# Altium PCB 24DC-8MWPCB.PcbDoc (part 1 of 2)
Units mm, origin at the board's own origin, x right, y up, seen from the top; angles counter-clockwise.
Board outline 24.64 x 72.65 mm, 2 copper layers (Bottom Layer, Top Layer); 12 components, 34 nets, 50 pads, 4349 vias.
Unrouted connection lines stored in the file: 12.
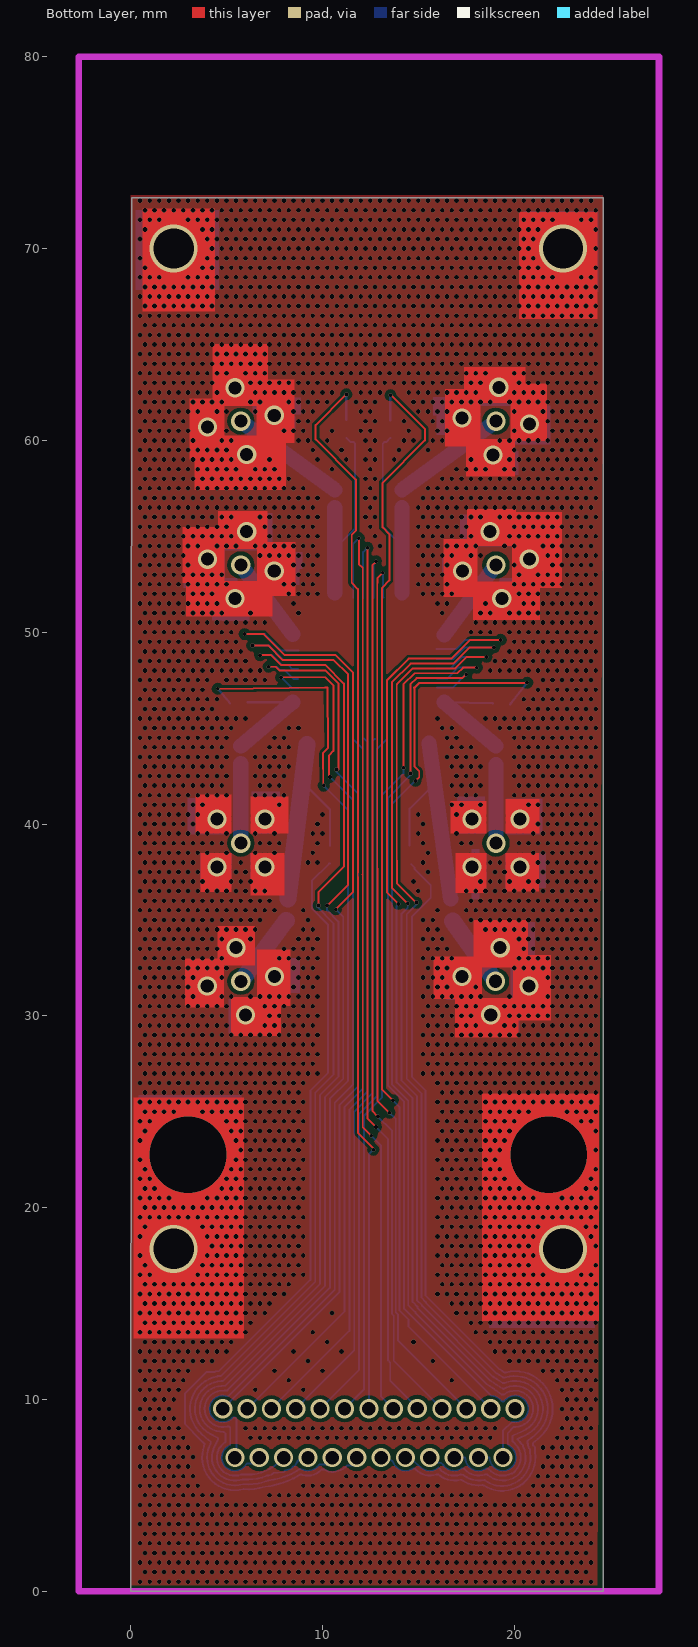
[diagram p0: Bottom Layer view]
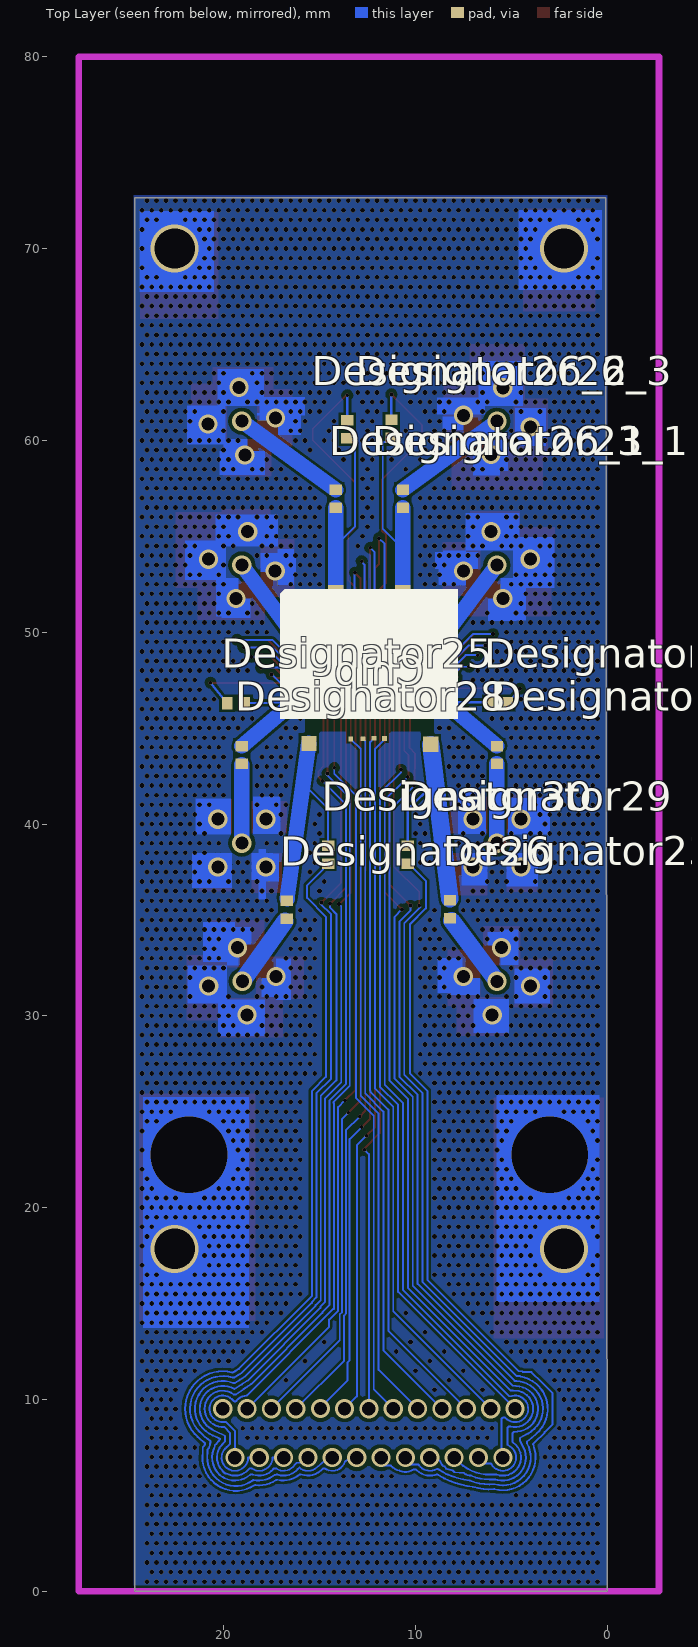
[diagram p1: Top Layer view, seen from below]

## Layer stack, top to bottom
Top Solder: solder mask 0.0102, Solder Resist, Dk 3.5
Bottom Layer: signal copper 0.0356
Dielectric 1: dielectric 0.32, FR-4, Dk 4.8
Top Layer: signal copper 0.0356
Bottom Solder: solder mask 0.0102, Solder Resist, Dk 3.5

## Board outline
0,0 24.638,0 24.638,72.65 0.075,72.65

## Design rules (kind name [scope] priority, off if disabled: settings)
Clearance [All] p1: gap=0.2 ignorepadtopadclearanceinfootprint=FALSE except(0.1: Arc-Arc Arc-Track Track-Track; 0.127: Arc-Fill Arc-Poly Arc-Region Track-Fill Track-Poly Track-Region SMDPad-Fill SMDPad-Poly SMDPad-Region; 0.25: Via-Via Via-Hole)
PolygonConnect [All] p1: connectstyle=Relief reliefconductorwidth=0.254 reliefentries=4 polygonreliefangle="90 Angle" airgapwidth=0.254
RoutingVias [All] p1: holewidth=0.711 width=1.27 viastyle="Through Hole" minholewidth=0.711 minwidth=1.27 maxholewidth=0.711 maxwidth=1.27
SolderMaskExpansion [All] p1: expansion=0.102 istentingtop=FALSE
Width "DC Width" [InNetClass('DC')] p1: maxlimit=0.254 minlimit=0.1 preferedwidth=0.254 minimp=50.000000 maximp=50.000000 favimp=50.000000
Width "MW Width" [InNetClass('MW')] p2: maxlimit=0.8 minlimit=0.254 preferedwidth=0.254 minimp=50.000000 maximp=50.000000 favimp=50.000000
30 further rules are at their usual default settings.

## Classes and differential pairs
net class DC: DC1 DC2 DC3 DC4 DC5 DC6 DC7 DC8 DC9 DC10 DC11 DC12 DC13 DC14 DC15 DC16 DC17 DC18 DC19 DC20 DC21 DC22 DC23 DC24
net class MW: MW1 MW3 MW4 MW5 MW6 MW7 "MW 2" "MW 8"

## Components (designator, comment, footprint, x,y, rotation, side; value= is the part's Value field where it differs from the comment)
Designator23 "Comment" CAPC1005X55N 8.2,35.55 r90 bottom
Designator23_1 "Comment" CAPC1005X55N 10.65,56.95 r90 bottom
Designator24 "Comment" CAPC1005X55N 5.65,46.3 r0 bottom
Designator25 "Comment" CAPC1005X55N 19.35,46.3 r0 bottom
Designator26 "Comment" CAPC1005X55N 16.7,35.535 r90 bottom
Designator26_1 "Comment" CAPC1005X55N 14.15,56.95 r90 bottom
Designator26_2 "Comment" CAPC1005X55N 13.55,60.585 r90 bottom
Designator26_3 "Comment" CAPC1005X55N 11.25,60.6 r90 bottom
Designator27 "Comment" CAPC1005X55N 5.75,43.6 r90 bottom
Designator28 "Comment" CAPC1005X55N 19.05,43.6 r90 bottom
Designator29 "Comment" CAPC1005X55N 10.4,38.4 r90 bottom
Designator30 "Comment" CAPC1005X55N 14.55,38.4 r90 bottom

## Footprints (in the part's own frame and the unit in brackets; to place one, negate y for a bottom-side part, rotate by r counter-clockwise, add the part's x,y. Pads: shape width x height; smd on the part's side, far side on the other; paste and mask are expansions set on the pad)
CAPC1005X55N [mm]
  rect 0.55x0.64 smd: 1(-0.465,0) 2(0.465,0)

## Free pads (board coordinates)
  rect 0.25x0.25 smd far side: 2(8.724,47.094) 2(8.738,47.569) 2(8.744,48.078) 2(8.75,48.55) 2(8.764,49.042) 2(11.608,44.458) 2(11.609,51.778) 2(12.126,51.771) 2(12.16,44.47) 2(12.656,51.778) 2(12.736,44.44) 2(13.193,51.799) 2(13.366,44.428) 2(15.946,49.113) 2(15.962,47.107) 2(15.962,48.102) 2(15.962,48.599) 2(15.973,47.583)
  rect 0.8x0.8 smd far side: 3(10.65,52.05) 3(14.15,52.05) 38(8.45,49.85) 41(16.35,49.85) Pad1(8.45,46.35) Pad1(9.2,44.15) Pad1(15.55,44.2) Pad1(16.35,46.35)

## Via types
v1: diameter 0.25, hole 0.25, Bottom Layer to Top Layer, 4242 vias
v2: diameter 1, hole 0.68, Bottom Layer to Top Layer, 40 vias
v3: diameter 0.2, hole 0.2, Bottom Layer to Top Layer, 36 vias
v4: diameter 1, hole 0.7, Bottom Layer to Top Layer, 25 vias
v5: diameter 2.5, hole 2.1, Bottom Layer to Top Layer, 3 vias
v6: diameter 4, hole 4, Bottom Layer to Top Layer, 2 vias
v7: diameter 2.5/2.5 (per signal layer), hole 2.1, Bottom Layer to Top Layer, 1 vias

## Nets (pads, with @x,y where several pads share a name; then routed paths per layer and width w, separated by ;. In a path a pad name is that pad's centre, name@x,y a point inside that pad or via, vN(x,y) a via of type N, cw(c..) or ccw(c..) an arc to the next point about the centre after c; other vN are vias at no path point)
DC1: pad.2@8.738,47.569 | length 47.2
  Bottom Layer w0.1: v3(7.2,48.2) 7.576,48.2 7.763,48.014 10.153,48.014 10.317,47.85 10.834,47.333 v3@10.834,42.843
  Top Layer w0.1: v4@4.972,9.677 v4(4.805,9.51) 10.901,15.606 10.901,25.36 11.85,26.309 11.85,41.6 10.744,42.706 v3(10.744,42.843) ; v3(7.2,48.2) 7.622,48.2 7.796,48.026 8.037,48.026 8.494,47.569 pad.2@8.738,47.569
DC2: pad.2@11.608,44.458 | length 37.5
  Top Layer w0.1: v4(6.075,9.51) 11.155,14.59 11.155,25.255 12.104,26.204 12.104,43.922 pad.2@11.662,44.364
DC3: pad.2@12.16,44.47 | length 37.1
  Top Layer w0.1: v4(7.345,9.51) 11.409,13.574 11.409,25.109 12.35,26.05 12.35,26.091 12.358,26.099 12.358,44.272 pad.2@12.16,44.47
DC4: pad.2@12.736,44.44 | length 36.9
  Top Layer w0.1: v4@8.851,9.51 v4(8.615,9.51) 11.663,12.558 11.663,25.004 12.612,25.953 12.612,44.316 pad.2@12.736,44.44
DC5: pad.2@13.366,44.428 | length 36.4
  Top Layer w0.1: v4(9.885,9.51) 11.917,11.542 11.917,24.899 12.85,25.832 12.85,43.912 pad.2@13.366,44.428
DC6: pad.2@15.973,47.583 | length 45.5
  Bottom Layer w0.1: v3(14.228,42.929) 14.228,47.278 14.808,47.858 17.044,47.858 17.336,48.15 v3(18.05,48.15)
  Top Layer w0.1: v4(11.155,9.51) 12.171,10.526 12.171,24.793 13.104,25.726 13.104,41.504 14.228,42.628 v3(14.228,42.929) ; pad.2@15.973,47.583 16.515,47.583 17.096,48.164 18.036,48.164 v3(18.05,48.15)
DC7: Designator26_3.1 Designator26_3.2 | length 63
  Bottom Layer w0.1: v3(11.25,62.4) 9.65,60.8 9.65,60.05 11.75,57.95 11.75,55.3 11.531,55.081 11.531,52.569 11.85,52.25 11.85,37.468 11.846,37.464 11.846,37.254 11.85,37.25 11.85,23.9 v3@12.695,23.055
  Bottom Layer w0.127: v4(12.425,9.51) v4@12.425,9.696
  Top Layer w0.1: 10.7,54.4 11.7,55.4 11.7,59.849 11.626,59.923 11.462,59.923 Designator26_3.1@11.25,60.135 ; v4(12.425,9.51) 12.425,22.785 v3(12.658,23.018)
  Top Layer w0.127: Designator26_3.2@11.25,61.065 v3(11.25,62.4)
DC8: pad.2@11.609,51.778 | length 49.4
  Bottom Layer w0.1: v3(11.9,54.9) 11.9,53.554 12.104,53.35 12.104,37.355 ; 12.1,37.359 12.104,37.355 ; v3(12.55,23.75) 12.104,24.196 12.104,37.355
  Top Layer w0.1: pad.2@11.609,51.778 11.609,54.609 v3(11.9,54.9) ; v3(12.55,23.75) 13.048,23.252 13.048,10.157 v4(13.695,9.51)
DC9: pad.2@12.126,51.771 | length 48.7
  Bottom Layer w0.1: v3(12.35,54.4) 12.358,54.392 12.358,52.85 ; 12.354,52.85 12.354,37.464 12.358,37.46 12.358,24.642 v3(12.8,24.2)
  Top Layer w0.1: pad.2@12.126,51.771 12.126,54.176 v3(12.35,54.4) v3@12.35,54.38 ; v3(12.8,24.2) 13.426,23.574 13.426,12.037 13.54,11.922 13.54,10.975 14.948,9.567 v4(14.948,9.527)
DC10: pad.2@12.656,51.778 | length 47.8
  Bottom Layer w0.1: 12.608,52.662 12.608,37.57 12.612,37.566 12.612,25.038 v3(12.9,24.75) ; 12.612,52.662 12.612,53.492 12.8,53.68 v3(12.8,53.7)
  Top Layer w0.1: pad.2@12.656,51.778 12.656,53.529 12.8,53.673 v3(12.8,53.7) ; v3(12.9,24.75) 13.626,24.024 13.626,14.465 13.72,14.371 13.72,12.025 v4(16.235,9.51)
DC11: pad.2@13.193,51.799 | length 47
  Bottom Layer w0.1: v3(13.15,53.1) 12.866,52.816 12.866,52.557 12.862,52.553 12.862,37.675 12.866,37.671 12.866,25.584 v3(13.5,24.95)
  Top Layer w0.1: v3(13.15,53.1) 13.169,53.081 13.169,51.823 pad.2@13.193,51.799 ; v3(13.5,24.95) 13.826,24.624 13.826,14.548 13.942,14.432 13.942,13.073 v4(17.505,9.51)
DC12: Designator26_2.1 Designator26_2.2 | length 65
  Bottom Layer w0.1: v3@13.575,62.375 15.35,60.6 15.35,60 13.14,57.791 13.14,55.46 13.5,55.1 13.5,52.7 13.116,52.316 13.116,37.78 13.12,37.776 13.12,26.157 v3(13.678,25.599)
  Top Layer w0.1: Designator26_2.1@13.55,60.135 13.324,59.908 13.224,59.908 13.15,59.834 13.15,55.5 14.3,54.35 ; v3(13.678,25.599) 13.678,25.592 14.026,25.244 14.026,14.631 14.494,14.163 14.494,13.791 v4(18.775,9.51)
  Top Layer w0.127: Designator26_2.2@13.55,61.05 v3(13.55,62.35)
DC13: 
  other v4: 20.045,9.51
DC14: pad.2@8.724,47.094 | length 49.7
  Bottom Layer w0.1: v3(7.85,47.65) 10.158,47.65 10.212,47.596 10.58,47.228 10.58,43.806 10.356,43.582 v3@10.356,42.45
  Top Layer w0.1: 5.046,10.164 4.955,10.184 ccw(c4.805,9.51) 4.803,8.82 ccw(c4.805,9.36) 4.805,8.819 ccw(c4.805,9.51) 5.298,9.027 cw(c5.389,8.938) 5.516,8.938 5.516,7.114 5.55,7.08 v4(5.44,6.97) ; 5.047,10.164 5.1,10.164 10.647,15.711 10.647,25.465 11.596,26.414 11.596,41.254 v3(10.4,42.45) ; v3(7.85,47.65) 7.844,47.65 8.4,47.094 pad.2@8.724,47.094
DC15: Designator24.1 Designator24.2 | length 57.1
  Bottom Layer w0.1: v3@4.551,47.04 10.132,47.119 10.259,47.121 10.304,43.97 10.023,43.681 v3@10.047,41.999
  Top Layer w0.1: 5.071,8.6 ccw(c5.073,8.473) 5.042,8.596 cw(c4.805,9.51) 4.762,10.454 ccw(c4.441,17.217) 5.05,10.473 10.393,15.816 10.393,25.672 11.342,26.621 11.342,40.727 v3(10.07,41.999) ; 5.072,8.6 cw(c5.073,8.473) 5.074,8.6 5.126,8.6 5.162,8.563 cw(c5.073,8.473) 5.163,8.562 5.2,8.525 5.2,7.648 5.163,7.611 ; 5.078,7.558 ccw(c5.44,6.97) 6.031,6.612 6.041,6.623 6.078,6.66 6.71,6.66 v4(6.71,6.97) ; 5.079,7.559 5.162,7.61
  Top Layer w0.127: v3(4.55,47.05) Designator24.1@5.185,46.3 ; Designator24.2@6.1,46.35 8.4,46.35 8.45,46.3
DC16: pad.2@8.764,49.042 | length 59.7
  Bottom Layer w0.1: v3(5.95,49.9) 6.954,49.9 8.05,48.804 10.696,48.804 11.596,47.904 11.596,36.446 v3(10.7,35.55)
  Top Layer w0.1: v3(5.95,49.9) 7,49.9 7.858,49.042 pad.2@8.764,49.042 ; v4(7.98,6.97) 7.947,6.929 7.911,6.885 7.88,6.885 cw(c6.104,8.43) 5.828,6.092 ccw(c5.813,5.966) 5.769,6.085 cw(c5.44,6.97) 5.324,6.033 cw(c5.434,6.929) 5.312,6.034 cw(c5.44,6.97) 4.896,7.742 4.901,7.746 4.946,7.791 4.946,8.237 4.909,8.274 ccw(c4.819,8.185) 4.908,8.275 4.872,8.312 4.855,8.312 cw(c4.805,9.51) 4.752,10.707 ccw(c4.441,17.217) 4.936,10.719 10.139,15.922 10.139,25.777 11.088,26.726 11.088,35.162 v3(10.7,35.55)
DC17: pad.2@8.75,48.55 | length 59.9
  Bottom Layer w0.1: v3(6.35,49.3) 7.195,49.3 7.945,48.55 10.591,48.55 11.342,47.799 11.342,41.383 11.342,36.842 v3(10.25,35.75)
  Top Layer w0.1: v3(6.35,49.3) 7.241,49.3 7.991,48.55 pad.2@8.75,48.55 ; v4(9.25,6.97) 8.804,6.85 8.76,6.839 8.728,6.807 8.593,6.573 8.57,6.532 8.482,6.509 8.45,6.477 8.4,6.39 8.355,6.378 8.044,6.295 cw(c7.91,6.343) 8.028,6.262 cw(c7.91,6.343) 7.947,6.205 7.934,6.204 7.474,6.174 cw(c7.111,6.537) 7.111,6.024 cw(c6.104,8.43) 6.145,5.822 5.847,5.817 ccw(c5.85,5.577) 5.797,5.811 5.711,5.803 cw(c5.44,6.97) 4.356,7.482 4.539,7.869 ccw(c4.424,7.923) 4.551,7.925 4.55,8 4.122,8.228 cw(c4.805,9.51) 3.373,9.752 3.406,9.948 3.49,10.128 cw(c4.805,9.51) 4.729,10.961 4.824,10.966 9.885,16.027 9.885,25.882 10.834,26.831 10.834,34.916 10.25,35.5 v3(10.25,35.75)
DC18: pad.2@8.744,48.078 | length 60.3
  Bottom Layer w0.1: v3(6.75,48.8) 7.336,48.8 7.84,48.296 10.154,48.296 11.126,47.324 11.126,37.781 9.8,36.455 v3(9.8,35.75)
  Top Layer w0.1: v3(6.75,48.8) 7.382,48.8 7.899,48.283 8.235,48.283 8.44,48.078 pad.2@8.744,48.078 ; 9.725,35.675 10.58,34.82 10.58,26.936 9.631,25.987 9.631,16.132 4.714,11.215 4.541,11.215 4.518,11.192 ccw(c4.805,9.51) 3.518,8.39 3.518,8.384 3.522,8.38 3.674,8.228 3.675,8.228 3.686,8.217 ccw(c7.287,11.992) 4.181,7.801 4.181,7.749 cw(c4.054,7.749) 4.181,7.745 4.181,7.734 cw(c4.054,7.737) 4.167,7.68 4.084,7.514 cw(c3.957,7.513) 4.084,7.513 4.043,7.368 4.042,7.364 ccw(c5.44,6.97) 5.85,5.577 5.876,5.577 ccw(c6.104,8.43) 7.158,5.769 cw(c7.205,5.651) 7.189,5.777 ccw(c6.663,9.913) 8.314,6.084 8.315,6.085 8.398,6.123 8.403,6.123 8.829,6.376 8.863,6.376 cw(c8.864,6.249) 8.865,6.376 9.01,6.322 ccw(c9.25,6.97) 9.803,6.557 9.809,6.563 ; 9.809,6.563 9.846,6.6 10.55,6.6 v4@10.55,6.97
  other v4: 10.52,6.97
DC19: Designator29.1 Designator29.2 | length 49.3
  Top Layer w0.1: Designator29.1@10.4,37.935 10.355,37.935 9.45,37.03 9.45,35.6 10.289,34.761 10.289,27.005 9.377,26.093 9.377,16.237 4.609,11.469 4.436,11.469 4.394,11.427 3.949,11.427 3.419,10.896 2.844,10.322 2.844,9.51 2.844,8.718 3.264,8.298 3.264,8.279 3.268,8.275 3.798,7.745 3.876,7.666 3.83,7.619 3.83,7.548 3.817,7.5 3.788,7.399 3.788,7.398 ccw(c5.44,6.97) 5.862,5.316 cw(c5.893,5.193) 5.901,5.32 ccw(c6.104,8.43) 6.998,5.445 cw(c7.035,5.323) 7.021,5.449 ccw(c6.54,9.77) 8.185,5.746 8.187,5.747 8.453,5.869 8.508,5.869 8.56,5.92 8.846,6.091 8.904,6.091 8.965,6.068 8.968,6.068 ccw(c9.25,6.97) 9.925,6.309 9.962,6.346 10.104,6.346 ccw(c10.52,6.97) 10.813,6.28 cw(c10.852,6.187) 10.831,6.285 ccw(c10.653,7.105) 11.282,6.55 11.8,6.55 v4@11.8,6.97
  Top Layer w0.127: 9.037,42.113 10.4,40.75 Designator29.2@10.4,38.865
  other v4: 11.79,6.97
DC20: Designator30.1 Designator30.2 | length 49.3
  Top Layer w0.1: v4(13.06,6.97) ccw(c20.412,30.846) 13.597,6.811 cw(c13.562,6.689) 13.682,6.733 ccw(c14.33,6.97) 14.723,6.402 14.76,6.402 cw(c14.76,6.275) 14.761,6.402 14.806,6.402 14.841,6.373 cw(c14.76,6.275) 14.842,6.372 15.066,6.186 15.074,6.186 ccw(c15.6,6.97) 15.958,6.096 15.981,6.096 cw(c15.982,5.969) 15.983,6.096 16.035,6.096 16.093,6.037 16.116,6.037 16.222,5.958 16.228,5.958 ccw(c16.87,6.97) 17.176,5.811 17.191,5.811 cw(c17.192,5.684) 17.193,5.811 17.226,5.811 17.233,5.804 17.266,5.804 17.425,5.704 17.429,5.704 ccw(c18.14,6.97) 18.333,5.53 cw(c18.35,5.405) 18.419,5.511 ccw(c19.364,6.976) 21.087,7.241 21.087,7.508 20.991,7.604 ccw(c14.376,5.239) 20.978,7.64 20.978,7.67 20.978,7.722 21.015,7.759 ; Designator30.2@14.55,38.865 14.55,40.8 15.8,42.05 ; Designator30.1@14.629,37.901 14.807,37.723 14.807,37.645 15.65,36.801 15.65,36.15 14.664,35.164 14.664,26.811 15.388,26.087 15.388,15.408 19.203,11.593 cw(c-4.12,-25.278) 19.464,11.427 ccw(c19.532,11.534) 19.563,11.41 cw(c20.045,9.51) 21.508,8.205 21.508,8.201 21.357,8.049 21.355,8.049 cw(c18.602,10.95) 21.087,7.817 21.016,7.76
DC21: pad.2@15.962,48.102 | length 61.2
  Bottom Layer w0.1: v3(14.9,35.9) 13.882,36.918 13.882,38.092 13.878,38.096 13.878,47.278 13.896,47.296 13.896,47.305 14.703,48.112 16.939,48.112 17.54,48.713 v3(18.55,48.713)
  Top Layer w0.1: v4(14.33,6.97) ccw(c14.62,7.26) 14.62,6.85 cw(c14.62,6.723) 14.702,6.82 15.158,6.44 ccw(c15.6,6.97) 15.959,6.38 ccw(c15.6,6.97) 16.05,6.446 16.126,6.384 cw(c16.08,6.327) 16.151,6.344 16.152,6.338 16.199,6.291 16.2,6.291 16.307,6.212 ccw(c16.87,6.97) 17.191,6.082 17.212,6.082 cw(c17.213,5.955) 17.213,6.082 17.225,6.082 17.237,6.079 cw(c17.213,5.955) 17.239,6.079 17.338,6.059 17.339,6.059 ; v3@14.947,35.853 14.399,35.304 14.399,26.717 15.161,25.955 15.161,15.314 15.4,15.075 15.4,15.037 19.044,11.393 cw(c-4.12,-25.278) 19.422,11.151 ccw(c19.491,11.258) 19.53,11.137 cw(c20.045,9.51) 21.256,8.308 cw(c20.449,9.108) 21.255,8.306 ; pad.2@15.962,48.102 16.675,48.102 17.286,48.713 v3(18.55,48.713) ; 17.339,6.058 17.343,6.056 17.499,5.958 ccw(c18.14,6.97) 18.439,5.809 ccw(c19.364,6.976) 18.484,5.775 ccw(c19.364,6.976) 20.833,7.221 20.833,7.403 20.79,7.445 20.77,7.465 ccw(c14.376,5.239) 20.723,7.597 ccw(c14.376,5.239) 20.715,7.618 20.715,7.703 20.692,7.726 20.692,7.776 20.692,7.828 20.73,7.865 ; 20.73,7.866 20.825,7.936 ccw(c18.602,10.95) 21.252,8.303 21.254,8.306
DC22: pad.2@15.962,48.599 | length 61.2
  Bottom Layer w0.1: v3(14.45,35.85) 13.628,36.672 13.628,37.986 13.624,37.99 13.624,47.392 14.598,48.366 16.834,48.366 17.668,49.2 v3(18.95,49.2)
  Top Layer w0.1: v3(14.45,35.85) 14.45,35.638 14.12,35.308 14.12,26.637 14.934,25.823 14.934,15.182 15.2,14.916 15.2,14.878 18.884,11.193 cw(c-4.12,-25.278) 19.389,10.87 ccw(c19.458,10.976) 19.505,10.859 cw(c20.045,9.51) 21.073,8.484 cw(c19.759,9.796) 20.579,8.13 20.578,8.129 20.322,8.011 20.172,7.942 20.172,7.92 20.248,7.843 20.304,7.787 20.304,7.771 20.329,7.746 20.329,7.739 cw(c19.41,6.97) 20.365,7.694 20.461,7.598 20.461,7.543 cw(c19.364,6.976) 20.046,5.946 ; v4(15.6,6.97) 15.6,6.7 16.183,6.7 16.294,6.59 ccw(c16.87,6.97) 17.247,6.391 cw(c17.316,6.285) 17.414,6.366 ccw(c18.14,6.97) 18.488,6.092 cw(c18.535,5.974) 18.619,6.07 ccw(c19.41,6.97) 19.877,5.866 ccw(c19.41,6.97) 20.042,5.952 ; pad.2@15.962,48.599 16.813,48.599 17.414,49.2 v3(18.95,49.2)
DC23: pad.2@15.946,49.113 | length 60.5
  Bottom Layer w0.1: v3@13.974,35.826 13.374,36.426 13.374,37.881 13.37,37.885 13.37,47.498 14.492,48.62 16.728,48.62 17.708,49.6 v3(19.3,49.6)
  Top Layer w0.1: v3(13.974,35.827) 13.866,35.719 13.866,26.531 14.707,25.691 14.707,15.088 14.95,14.845 14.95,14.768 18.725,10.994 cw(c-4.12,-25.278) 19.367,10.581 cw(c-4.12,-25.278) 19.431,10.539 cw(c20.045,9.51) 20.906,8.676 cw(c20.049,9.506) 20.893,8.663 cw(c19.759,9.796) 20.43,8.34 19.918,8.104 19.918,7.814 20.05,7.682 20.05,7.666 20.075,7.641 cw(c19.41,6.97) 20.172,7.528 20.207,7.493 20.207,7.478 cw(c19.364,6.976) 20.223,7.45 cw(c19.364,6.976) 20.054,6.279 20.054,6.254 20,6.2 19.97,6.2 19.916,6.146 19.872,6.146 cw(c19.41,6.97) 18.683,6.367 ccw(c18.586,6.285) 18.517,6.391 cw(c18.14,6.97) 17.449,6.97 v4(16.87,6.97) ; pad.2@15.946,49.113 16.968,49.113 17.455,49.6 v3(19.3,49.6)
DC24: Designator25.1 Designator25.2 | length 58.3
  Bottom Layer w0.1: 14.8,47.1 14.8,43 15.05,42.75 15.05,42.45 v3(14.85,42.25)
  Bottom Layer w0.127: 14.8,47.1 15.05,47.35 v3@20.7,47.35
  Top Layer w0.1: v3(14.85,42.25) 13.624,41.024 13.624,26.431 14.48,25.575 14.48,14.918 14.85,14.547 14.85,14.509 18.565,10.794 cw(c11.936,0.214) 19.335,10.271 ccw(c19.41,10.373) 19.485,10.271 cw(c20.045,9.51) 20.104,8.567 ; v4(18.14,6.97) 18.719,6.97 ccw(c19.41,6.97) 19.8,6.4 19.811,6.4 19.837,6.426 ; 19.838,6.427 19.861,6.447 ccw(c19.41,6.97) 19.842,7.509 19.837,7.513 19.701,7.649 19.664,7.687 19.664,8.249 19.978,8.563 19.993,8.563 19.996,8.566 20.032,8.566 cw(c20.033,8.439) 20.034,8.566 ccw(c20.045,9.51) 20.094,8.567 20.104,8.567
  Top Layer w0.127: 16.4,46.35 Designator25.1@18.885,46.3 ; Designator25.2@19.8,46.25 19.83,46.288 v3(20.678,47.368)
DC25: pad.2@15.962,47.107 | length 50.5
  Bottom Layer w0.1: v3(14.59,42.641) 14.59,47.008 14.587,47.012 14.587,47.188 14.59,47.192 14.59,47.281 14.913,47.604 17.304,47.604 v3(17.5,47.8)
  Top Layer w0.1: 14.253,14.725 14.253,25.459 ; 14.259,25.459 14.259,25.513 13.424,26.348 13.424,41.374 v3@14.64,42.59 ; 14.275,14.725 18.8,10.2 cw(c18.775,9.51) 19.311,9.945 ccw(c19.41,10.025) 19.509,9.945 cw(c20.045,9.51) 19.672,10.091 cw(c20.045,9.51) 20.016,8.82 ; pad.2@15.962,47.107 16.787,47.107 17.48,47.8 v3(17.5,47.8) ; v4(19.41,6.97) 19.41,8.355 19.872,8.817 19.888,8.817 19.891,8.821 19.999,8.821